# Altium PCB LPCB230R0.PcbDoc
Units mm, origin at the board's own origin, x right, y up, seen from the top; angles counter-clockwise.
Board outline 91 x 149 mm, 2 copper layers (Top Layer, Bottom Layer); 72 components, 55 nets, 301 pads, 119 vias.
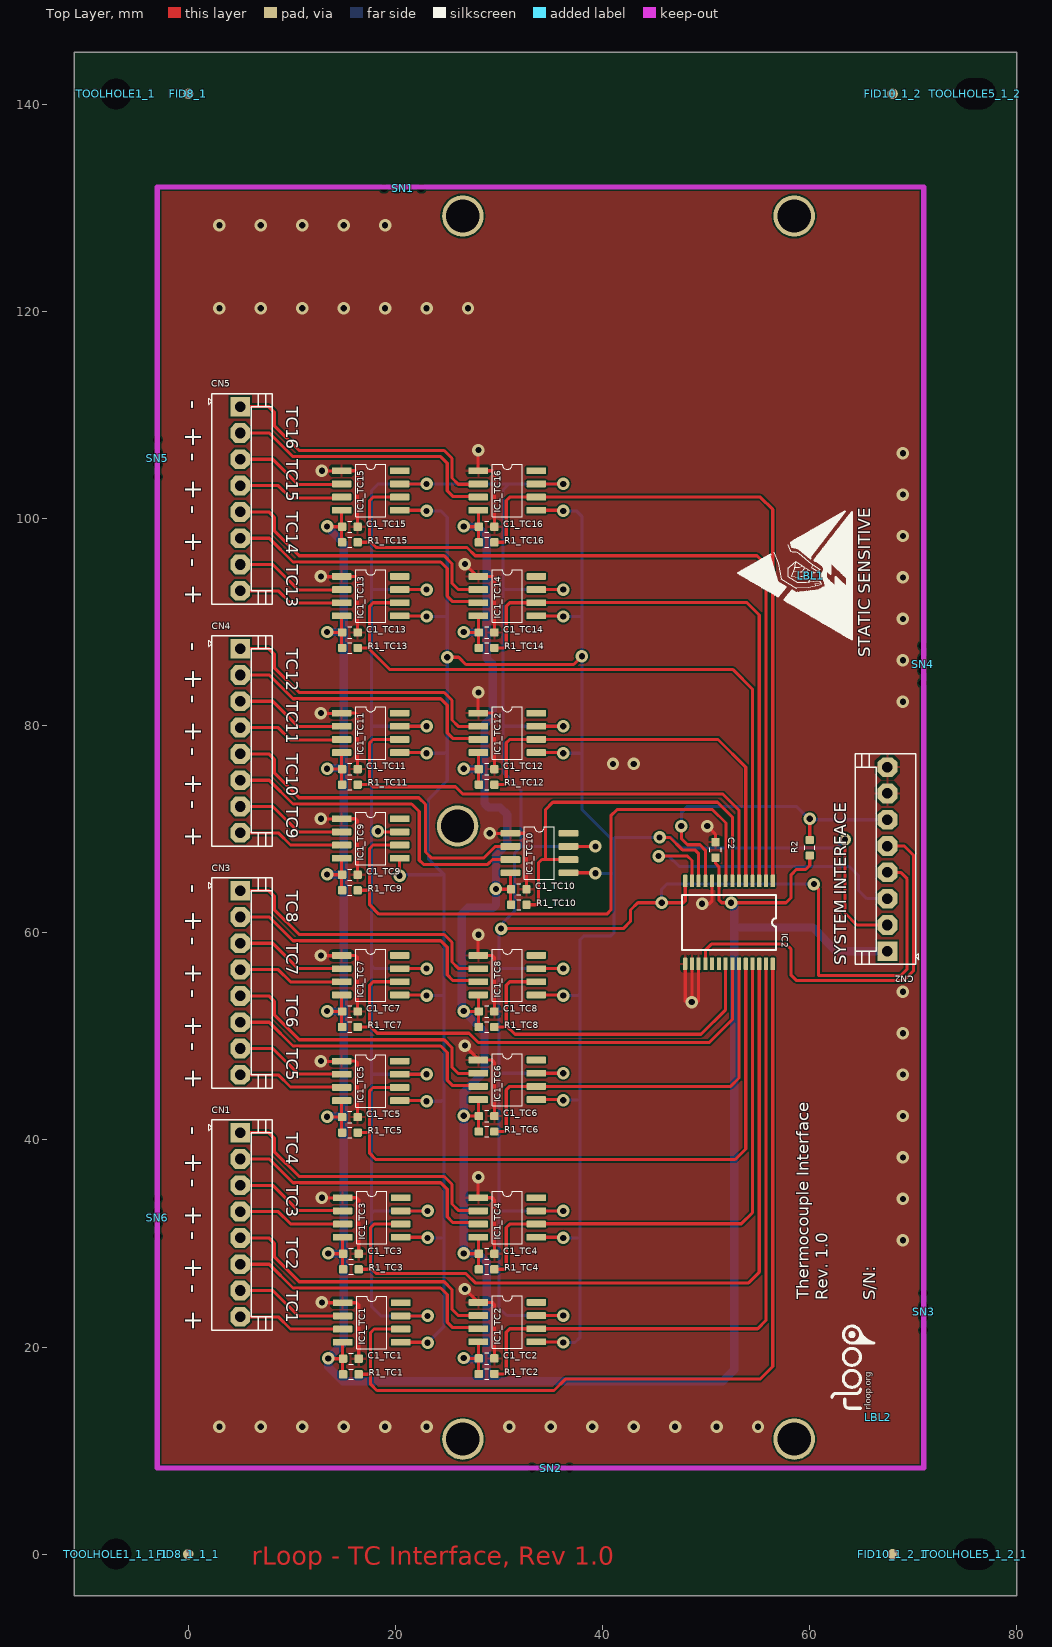
[diagram p0: Top Layer view]
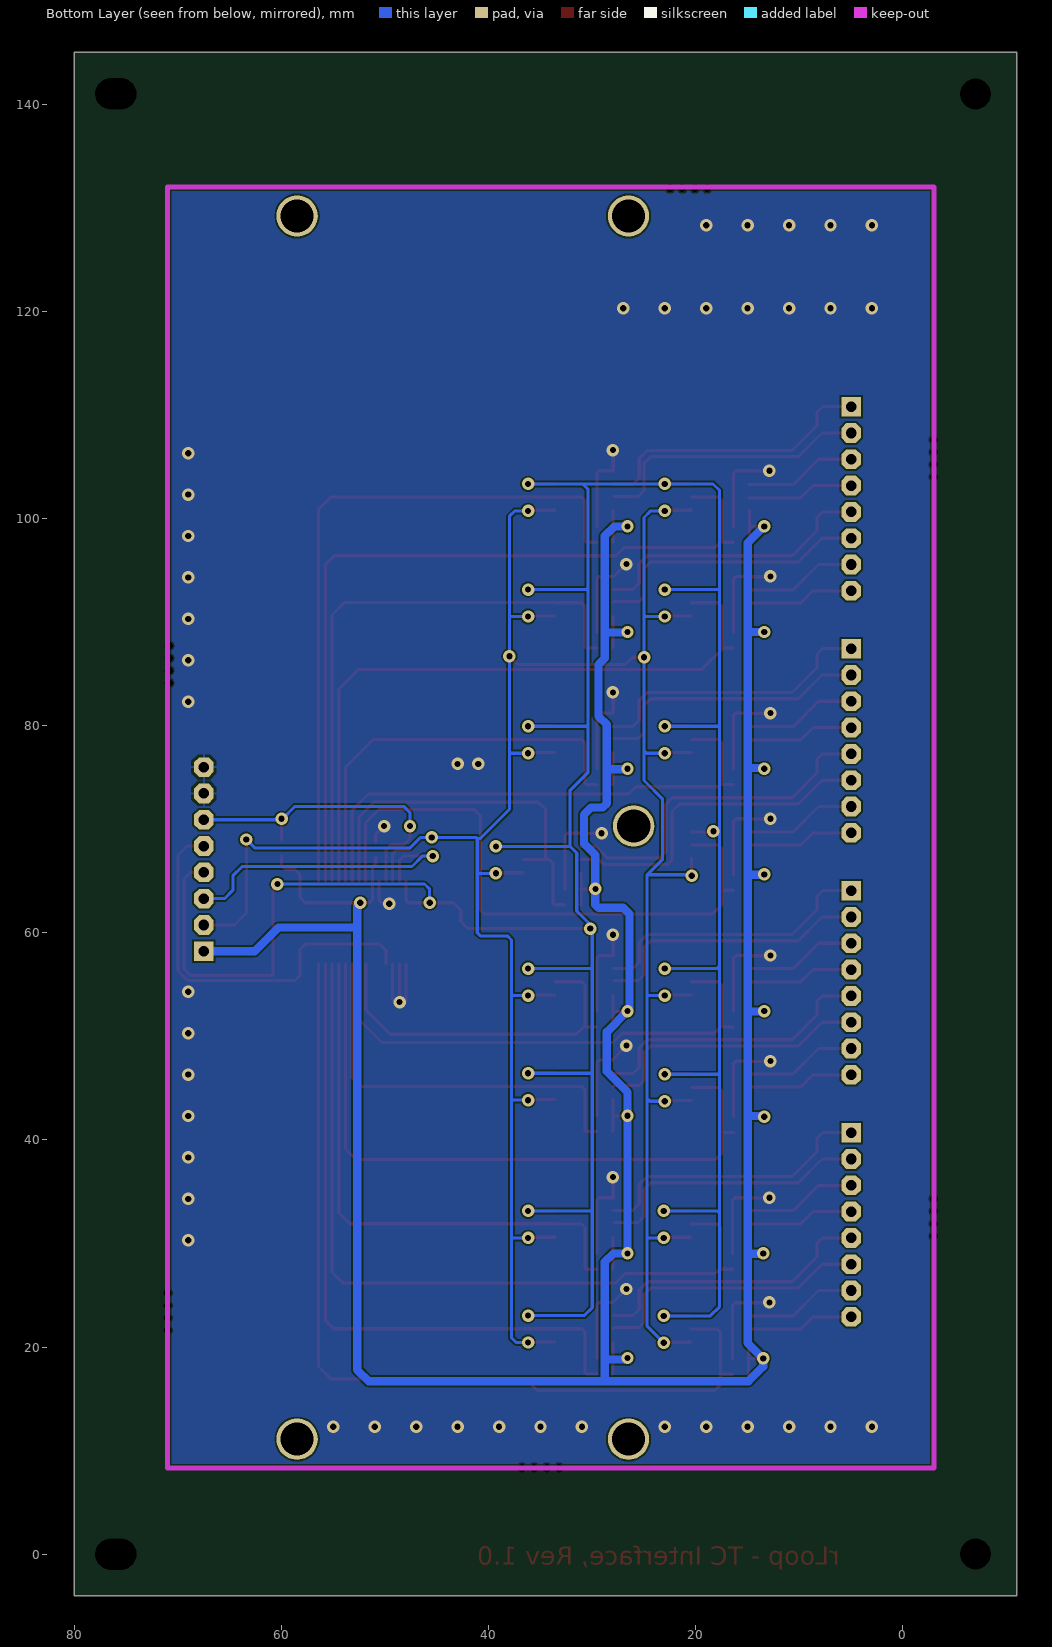
[diagram p1: Bottom Layer view, seen from below]

## Layer stack, top to bottom
Top Layer: signal copper 0.0356
Dielectric: core 0.32, FR-4, Dk 4.8
Bottom Layer: signal copper 0.0356

## Board outline
-11,-4 -11,145 80,145 80,-4

## Design rules (kind name [scope] priority, off if disabled: settings)
Clearance [All] p1: gap=0.16
HoleSize [All] p1: absolutevalues=TRUE maxlimit=4 minlimit=0.025 maxpercent=80.000 minpercent=20.000
MinimumSolderMaskSliver [All] p1 off: minsoldermaskwidth=0.1
PlaneClearance [All] p1: clearance=0.6
PlaneConnect [All] p1: planeconnectstyle=Direct reliefexpansion=0.508 reliefentries=4 reliefconductorwidth=0.254 reliefairgap=0.254
PolygonConnect [isVia] p1: connectstyle=Direct reliefconductorwidth=0.254 reliefentries=4 polygonreliefangle="90 Angle" airgapwidth=0.254
PolygonConnect PolygonConnect_1 [All] p2: connectstyle=Relief reliefconductorwidth=0.254 reliefentries=4 polygonreliefangle="90 Angle" airgapwidth=0.254
RoomDefinition "U_LPCB230 - TC INTERFACE" [InComponentClass('U_LPCB230 - TC INTERFACE')] p1: confinementstyle=ConfineIn formatcopy=TRUE lockcomponents=FALSE outline -79.611,-125.874 -28.811,-125.874 -28.811,-100.474 -79.611,-100.474
RoomDefinition TC16 [InComponentClass('TC16')] p2: confinementstyle=ConfineIn formatcopy=TRUE lockcomponents=FALSE outline 26.2,96.7 37.4,96.7 37.4,106.1 26.2,106.1
RoomDefinition TC15 [InComponentClass('TC15')] p3: confinementstyle=ConfineIn formatcopy=TRUE lockcomponents=FALSE outline 13,96.7 24.2,96.7 24.2,106.1 13,106.1
RoomDefinition TC14 [InComponentClass('TC14')] p4: confinementstyle=ConfineIn formatcopy=TRUE lockcomponents=FALSE outline 26.2,86.5 37.4,86.5 37.4,95.9 26.2,95.9
RoomDefinition TC13 [InComponentClass('TC13')] p5: confinementstyle=ConfineIn formatcopy=TRUE lockcomponents=FALSE outline 13,86.5 24.2,86.5 24.2,95.9 13,95.9
RoomDefinition TC10 [InComponentClass('TC10')] p6: confinementstyle=ConfineIn formatcopy=TRUE lockcomponents=FALSE outline 29.3,61.7 40.5,61.7 40.5,71.1 29.3,71.1
RoomDefinition TC8 [InComponentClass('TC8')] p7: confinementstyle=ConfineIn formatcopy=TRUE lockcomponents=FALSE outline 26.2,49.9 37.4,49.9 37.4,59.3 26.2,59.3
RoomDefinition TC7 [InComponentClass('TC7')] p8: confinementstyle=ConfineIn formatcopy=TRUE lockcomponents=FALSE outline 13,49.9 24.2,49.9 24.2,59.3 13,59.3
RoomDefinition TC6 [InComponentClass('TC6')] p9: confinementstyle=ConfineIn formatcopy=TRUE lockcomponents=FALSE outline 26.2,39.8 37.4,39.8 37.4,49.2 26.2,49.2
RoomDefinition TC5 [InComponentClass('TC5')] p10: confinementstyle=ConfineIn formatcopy=TRUE lockcomponents=FALSE outline 13,39.7 24.2,39.7 24.2,49.1 13,49.1
RoomDefinition TC4 [InComponentClass('TC4')] p11: confinementstyle=ConfineIn formatcopy=TRUE lockcomponents=FALSE outline 26.2,26.505 37.4,26.505 37.4,35.905 26.2,35.905
RoomDefinition TC3 [InComponentClass('TC3')] p12: confinementstyle=ConfineIn formatcopy=TRUE lockcomponents=FALSE outline 13.1,26.505 24.3,26.505 24.3,35.905 13.1,35.905
RoomDefinition TC2 [InComponentClass('TC2')] p13: confinementstyle=ConfineIn formatcopy=TRUE lockcomponents=FALSE outline 26.2,16.405 37.4,16.405 37.4,25.805 26.2,25.805
RoomDefinition TC1 [InComponentClass('TC1')] p14: confinementstyle=ConfineIn formatcopy=TRUE lockcomponents=FALSE outline 13.1,16.37 24.3,16.37 24.3,25.77 13.1,25.77
RoomDefinition "LPCB230 - OVERVIEW" [InComponentClass('LPCB230 - OVERVIEW')] p15: confinementstyle=ConfineIn formatcopy=TRUE lockcomponents=FALSE outline 129.189,-2.574 135.789,-2.574 135.789,20.725 129.189,20.725
RoomDefinition TC9 [InComponentClass('TC9')] p16: confinementstyle=ConfineIn formatcopy=TRUE lockcomponents=FALSE outline 13,63.1 24.2,63.1 24.2,72.5 13,72.5
RoomDefinition TC12 [InComponentClass('TC12')] p17: confinementstyle=ConfineIn formatcopy=TRUE lockcomponents=FALSE outline 26.2,73.3 37.4,73.3 37.4,82.7 26.2,82.7
RoomDefinition TC11 [InComponentClass('TC11')] p18: confinementstyle=ConfineIn formatcopy=TRUE lockcomponents=FALSE outline 13,73.3 24.2,73.3 24.2,82.7 13,82.7
RoutingVias [All] p1: holewidth=0.6 width=1.2 viastyle="Through Hole" minholewidth=0.6 minwidth=1.2 maxholewidth=1 maxwidth=3
SilkToSilkClearance [All] p1 off: silktosilkclearance=0.1
SilkToSolderMaskClearance [IsPad] p1 off: minsilkscreentomaskgap=0.1 clearancetoexposedcopper=TRUE
SolderMaskExpansion [All] p1: expansion=0.102
Width [All] p1: maxlimit=2 minlimit=0.254 preferedwidth=0.254
22 further rules are at their usual default settings.

## Classes and differential pairs
channel class "LPCB230 - TC CHANNEL": TC1 TC2 TC3 TC4 TC5 TC6 TC7 TC8 TC9 TC10 TC11 TC12 TC13 TC14 TC15 TC16
net class TC_POS[1..16]: TC_POS1 TC_POS2 TC_POS3 TC_POS4 TC_POS5 TC_POS6 TC_POS7 TC_POS8 TC_POS9 TC_POS10 TC_POS11 TC_POS12 TC_POS13 TC_POS14 TC_POS15 TC_POS16
net class TC_NEG[1..16]: TC_NEG1 TC_NEG2 TC_NEG3 TC_NEG4 TC_NEG5 TC_NEG6 TC_NEG7 TC_NEG8 TC_NEG9 TC_NEG10 TC_NEG11 TC_NEG12 TC_NEG13 TC_NEG14 TC_NEG15 TC_NEG16
net class TC_NCS[1..16]: TC_NCS1 TC_NCS2 TC_NCS3 TC_NCS4 TC_NCS5 TC_NCS6 TC_NCS7 TC_NCS8 TC_NCS9 TC_NCS10 TC_NCS11 TC_NCS12 TC_NCS13 TC_NCS14 TC_NCS15 TC_NCS16
component class "U_LPCB230 - TC INTERFACE": C2 IC2 R2
component class TC16: C1_TC16 IC1_TC16 R1_TC16
component class TC15: C1_TC15 IC1_TC15 R1_TC15
component class TC14: C1_TC14 IC1_TC14 R1_TC14
component class TC13: C1_TC13 IC1_TC13 R1_TC13
component class TC12: C1_TC12 IC1_TC12 R1_TC12
component class TC11: C1_TC11 IC1_TC11 R1_TC11
component class TC10: C1_TC10 IC1_TC10 R1_TC10
component class TC9: C1_TC9 IC1_TC9 R1_TC9
component class TC8: C1_TC8 IC1_TC8 R1_TC8
component class TC7: C1_TC7 IC1_TC7 R1_TC7
component class TC6: C1_TC6 IC1_TC6 R1_TC6
component class TC5: C1_TC5 IC1_TC5 R1_TC5
component class TC4: C1_TC4 IC1_TC4 R1_TC4
component class TC3: C1_TC3 IC1_TC3 R1_TC3
component class TC2: C1_TC2 IC1_TC2 R1_TC2
component class TC1: C1_TC1 IC1_TC1 R1_TC1
component class "LPCB230 - OVERVIEW": CN1 CN2 CN3 CN4 CN5 LBL1 LBL2 SN1 SN2 SN3 SN4 SN5 SN6 SN?

## Components (designator, comment, footprint, x,y, rotation, side; value= is the part's Value field where it differs from the comment)
C1_TC1 "100n / 50V / 10% / SMD 0603" LFP011__CC1608-0603-IPC7351_B 15.7,18.87 r0 top (schematic designator C1)
C1_TC2 "100n / 50V / 10% / SMD 0603" LFP011__CC1608-0603-IPC7351_B 28.8,18.905 r0 top (schematic designator C1)
C1_TC3 "100n / 50V / 10% / SMD 0603" LFP011__CC1608-0603-IPC7351_B 15.7,29.005 r0 top (schematic designator C1)
C1_TC4 "100n / 50V / 10% / SMD 0603" LFP011__CC1608-0603-IPC7351_B 28.8,29.005 r0 top (schematic designator C1)
C1_TC5 "100n / 50V / 10% / SMD 0603" LFP011__CC1608-0603-IPC7351_B 15.6,42.2 r0 top (schematic designator C1)
C1_TC6 "100n / 50V / 10% / SMD 0603" LFP011__CC1608-0603-IPC7351_B 28.8,42.3 r0 top (schematic designator C1)
C1_TC7 "100n / 50V / 10% / SMD 0603" LFP011__CC1608-0603-IPC7351_B 15.6,52.4 r0 top (schematic designator C1)
C1_TC8 "100n / 50V / 10% / SMD 0603" LFP011__CC1608-0603-IPC7351_B 28.8,52.4 r0 top (schematic designator C1)
C1_TC9 "100n / 50V / 10% / SMD 0603" LFP011__CC1608-0603-IPC7351_B 15.6,65.6 r0 top (schematic designator C1)
C1_TC10 "100n / 50V / 10% / SMD 0603" LFP011__CC1608-0603-IPC7351_B 31.9,64.2 r0 top (schematic designator C1)
C1_TC11 "100n / 50V / 10% / SMD 0603" LFP011__CC1608-0603-IPC7351_B 15.6,75.8 r0 top (schematic designator C1)
C1_TC12 "100n / 50V / 10% / SMD 0603" LFP011__CC1608-0603-IPC7351_B 28.8,75.8 r0 top (schematic designator C1)
C1_TC13 "100n / 50V / 10% / SMD 0603" LFP011__CC1608-0603-IPC7351_B 15.6,89 r0 top (schematic designator C1)
C1_TC14 "100n / 50V / 10% / SMD 0603" LFP011__CC1608-0603-IPC7351_B 28.8,89 r0 top (schematic designator C1)
C1_TC15 "100n / 50V / 10% / SMD 0603" LFP011__CC1608-0603-IPC7351_B 15.6,99.2 r0 top (schematic designator C1)
C1_TC16 "100n / 50V / 10% / SMD 0603" LFP011__CC1608-0603-IPC7351_B 28.8,99.2 r0 top (schematic designator C1)
C2 "100n / 50V / 10% / SMD 0603" LFP011__CC1608-0603-IPC7351_B 50.9,68 r90 top
CN1 "640456-8" 640456-8 5,31.805 r270 top locked
CN2 "640456-8" 640456-8 67.5,67.1 r90 top locked
CN3 "640456-8" 640456-8 5,55.171 r270 top locked
CN4 "640456-8" 640456-8 5,78.538 r270 top locked
CN5 "640456-8" 640456-8 5,101.905 r270 top locked
FID8_1 "FIDUCIAL" FIDTOP 0,141 r0 top
FID8_1_1_1 "FIDUCIAL" FIDTOP 0,0 r0 top
FID10_1_2 "FIDUCIAL" FIDTOP 68,141 r0 top
FID10_1_2_1 "FIDUCIAL" FIDTOP 68,0 r0 top
IC1_TC1 "MAX31855K" LFP017__SO-G8/Y1.9 17.7,22.37 r270 top (schematic designator IC1)
IC1_TC2 "MAX31855K" LFP017__SO-G8/Y1.9 30.8,22.405 r270 top (schematic designator IC1)
IC1_TC3 "MAX31855K" LFP017__SO-G8/Y1.9 17.7,32.505 r270 top (schematic designator IC1)
IC1_TC4 "MAX31855K" LFP017__SO-G8/Y1.9 30.8,32.505 r270 top (schematic designator IC1)
IC1_TC5 "MAX31855K" LFP017__SO-G8/Y1.9 17.6,45.7 r270 top (schematic designator IC1)
IC1_TC6 "MAX31855K" LFP017__SO-G8/Y1.9 30.8,45.8 r270 top (schematic designator IC1)
IC1_TC7 "MAX31855K" LFP017__SO-G8/Y1.9 17.6,55.9 r270 top (schematic designator IC1)
IC1_TC8 "MAX31855K" LFP017__SO-G8/Y1.9 30.8,55.9 r270 top (schematic designator IC1)
IC1_TC9 "MAX31855K" LFP017__SO-G8/Y1.9 17.6,69.1 r270 top (schematic designator IC1)
IC1_TC10 "MAX31855K" LFP017__SO-G8/Y1.9 33.9,67.7 r270 top (schematic designator IC1)
IC1_TC11 "MAX31855K" LFP017__SO-G8/Y1.9 17.6,79.3 r270 top (schematic designator IC1)
IC1_TC12 "MAX31855K" LFP017__SO-G8/Y1.9 30.8,79.3 r270 top (schematic designator IC1)
IC1_TC13 "MAX31855K" LFP017__SO-G8/Y1.9 17.6,92.5 r270 top (schematic designator IC1)
IC1_TC14 "MAX31855K" LFP017__SO-G8/Y1.9 30.8,92.5 r270 top (schematic designator IC1)
IC1_TC15 "MAX31855K" LFP017__SO-G8/Y1.9 17.6,102.7 r270 top (schematic designator IC1)
IC1_TC16 "MAX31855K" LFP017__SO-G8/Y1.9 30.8,102.7 r270 top (schematic designator IC1)
IC2 "MCP23S17-E/SS" LFP050__SSOP28 52.2,61 r180 top
LBL1 "STATIC LABEL" STATIC_LABEL 60.12,94.48 r90 top
LBL2 "RLOOP_LOGO" RLOOP_LOGO 66.6,13.2 r90 top
R1_TC1 "10K / 0.1W / 1% / SMD 0603" LFP020__CR1608-0603-IPC7351_B 15.7,17.37 r180 top (schematic designator R1)
R1_TC2 "10K / 0.1W / 1% / SMD 0603" LFP020__CR1608-0603-IPC7351_B 28.8,17.405 r180 top (schematic designator R1)
R1_TC3 "10K / 0.1W / 1% / SMD 0603" LFP020__CR1608-0603-IPC7351_B 15.7,27.505 r180 top (schematic designator R1)
R1_TC4 "10K / 0.1W / 1% / SMD 0603" LFP020__CR1608-0603-IPC7351_B 28.8,27.505 r180 top (schematic designator R1)
R1_TC5 "10K / 0.1W / 1% / SMD 0603" LFP020__CR1608-0603-IPC7351_B 15.6,40.7 r180 top (schematic designator R1)
R1_TC6 "10K / 0.1W / 1% / SMD 0603" LFP020__CR1608-0603-IPC7351_B 28.8,40.8 r180 top (schematic designator R1)
R1_TC7 "10K / 0.1W / 1% / SMD 0603" LFP020__CR1608-0603-IPC7351_B 15.6,50.9 r180 top (schematic designator R1)
R1_TC8 "10K / 0.1W / 1% / SMD 0603" LFP020__CR1608-0603-IPC7351_B 28.8,50.9 r180 top (schematic designator R1)
R1_TC9 "10K / 0.1W / 1% / SMD 0603" LFP020__CR1608-0603-IPC7351_B 15.6,64.1 r180 top (schematic designator R1)
R1_TC10 "10K / 0.1W / 1% / SMD 0603" LFP020__CR1608-0603-IPC7351_B 31.9,62.7 r180 top (schematic designator R1)
R1_TC11 "10K / 0.1W / 1% / SMD 0603" LFP020__CR1608-0603-IPC7351_B 15.6,74.3 r180 top (schematic designator R1)
R1_TC12 "10K / 0.1W / 1% / SMD 0603" LFP020__CR1608-0603-IPC7351_B 28.8,74.3 r180 top (schematic designator R1)
R1_TC13 "10K / 0.1W / 1% / SMD 0603" LFP020__CR1608-0603-IPC7351_B 15.6,87.5 r180 top (schematic designator R1)
R1_TC14 "10K / 0.1W / 1% / SMD 0603" LFP020__CR1608-0603-IPC7351_B 28.8,87.5 r180 top (schematic designator R1)
R1_TC15 "10K / 0.1W / 1% / SMD 0603" LFP020__CR1608-0603-IPC7351_B 15.6,97.7 r180 top (schematic designator R1)
R1_TC16 "10K / 0.1W / 1% / SMD 0603" LFP020__CR1608-0603-IPC7351_B 28.8,97.7 r180 top (schematic designator R1)
R2 "10K / 0.1W / 1% / SMD 0603" LFP020__CR1608-0603-IPC7351_B 60,68.2 r270 top
SN1 "PCB_SNAPOUT" SNAPOUT_NEW 22.5,131.9 r180 top
SN2 "PCB_SNAPOUT" SNAPOUT_NEW 36.8,8.305 r180 top
SN3 "PCB_SNAPOUT" SNAPOUT_NEW 71.012,21.607 r90 top
SN4 "PCB_SNAPOUT" SNAPOUT_NEW 70.9,84.105 r90 top
SN5 "PCB_SNAPOUT" SNAPOUT_NEW -3,104.005 r90 top
SN6 "PCB_SNAPOUT" SNAPOUT_NEW -3,30.705 r90 top
TOOLHOLE1_1 "Comment" TOOL-1#1 -7,141 r0 top
TOOLHOLE1_1_1_1 "Comment" TOOL-1#1 -7,0 r0 top
TOOLHOLE5_1_2 "Comment" TOOL-1#2 76,141 r0 top
TOOLHOLE5_1_2_1 "Comment" TOOL-1#2 76,0 r0 top

## Footprints (in the part's own frame and the unit in brackets; to place one, negate y for a bottom-side part, rotate by r counter-clockwise, add the part's x,y. Pads: shape width x height; smd on the part's side, far side on the other; paste and mask are expansions set on the pad)
640456-8 [mm] "Connector, Male Header, 8 Way"
  rect 1.905x1.905 hole 1.02: 1(-8.89,0)
  oct 1.905x1.905 hole 1.02: 2(-6.35,0) 3(-3.81,0) 4(-1.27,0) 5(1.27,0) 6(3.81,0) 7(6.35,0) 8(8.89,0)
  silkscreen extent -10.15,-3.04 10.17,3.1
FIDTOP [mil]
  round 40 smd mask+39.37: 1(0,0)
LFP011__CC1608-0603-IPC7351_B [mm]
  rrect25% 0.8x0.8 smd: 1(-0.75,0) 2(0.75,0)
  silkscreen extent -0.2,-0.55 0.2,0.55
LFP017__SO-G8/Y1.9 [mm]
  rrect25% 0.65x1.9 smd: 1(-1.905,-2.8) 2(-0.635,-2.8) 3(0.635,-2.8) 4(1.905,-2.8) 5(1.905,2.8) 6(0.635,2.8) 7(-0.635,2.8) 8(-1.905,2.8)
  silkscreen extent -2.52,-1.45 2.52,1.45
LFP020__CR1608-0603-IPC7351_B [mm]
  rrect25% 0.8x0.8 smd: 1(-0.75,0) 2(0.75,0)
  silkscreen extent -0.2,-0.5 0.2,0.5
LFP050__SSOP28 [mm]
  rrect25% 0.4x1.2 smd paste-0.05: 1(-4.225,-4) 2(-3.575,-4) 3(-2.925,-4) 4(-2.275,-4) 5(-1.625,-4) 6(-0.975,-4) 7(-0.325,-4) 8(0.325,-4) 9(0.975,-4) 10(1.625,-4) 11(2.275,-4) 12(2.925,-4) 13(3.575,-4) 14(4.225,-4) 15(4.225,4) 16(3.575,4) 17(2.925,4) 18(2.275,4) 19(1.625,4) 20(0.975,4) 21(0.325,4) 22(-0.325,4) 23(-0.975,4) 24(-1.625,4) 25(-2.275,4) 26(-2.925,4) 27(-3.575,4) 28(-4.225,4)
  silkscreen extent -4.55,-2.67 4.55,2.67
RLOOP_LOGO [mm]
  silkscreen extent 0.89,0.39 8.82,4.45
SNAPOUT_NEW [mm]
  round 0.4 hole 0.8 unplated: 0(0,0) 0(1.2,0) 0(2.4,0) 0(3.6,0)
STATIC_LABEL [mm]
  silkscreen extent -6.16,-3.95 6.18,7.02
TOOL-1#1 [mm]
  round 2.54 hole 3 unplated: TOOL(0,0)
TOOL-1#2 [mm]
  round 0.076 hole 3 slot 4 at 0 deg unplated: TOOL1(0,0)

## Part data
C1_TC1 C1_TC2 C1_TC3 C1_TC4 C1_TC5 C1_TC6 C1_TC7 C1_TC8 C1_TC9 C1_TC10 C1_TC11 C1_TC12 C1_TC13 C1_TC14 C1_TC15 C1_TC16 C2: "Capacitor, Ceramic Chip, 100nF (0.1uF), 50V, 5%, SMD 0603 [LCA016]"
CN1 CN2 CN3 CN4 CN5: "Connector, Male Header, 8 Way"
IC1_TC1 IC1_TC2 IC1_TC3 IC1_TC4 IC1_TC5 IC1_TC6 IC1_TC7 IC1_TC8 IC1_TC9 IC1_TC10 IC1_TC11 IC1_TC12 IC1_TC13 IC1_TC14 IC1_TC15 IC1_TC16: "IC, Thermocouple Interface, Type K, SMD SOIC-8 [LIC467]"
IC2: "IC, SPI IO Expander, 16bit, SMD SSOP28 [LIC289]"
R1_TC1 R1_TC2 R1_TC3 R1_TC4 R1_TC5 R1_TC6 R1_TC7 R1_TC8 R1_TC9 R1_TC10 R1_TC11 R1_TC12 R1_TC13 R1_TC14 R1_TC15 R1_TC16 R2: "Resistor, Ceramic Chip, 10K, 0.1W, 1%, SMD 0603 [LRE030]"

## Free pads (board coordinates)
  round 4 hole 3.2: B(26,70.305) B(26.5,11.105) B(26.5,129.205) B(58.5,11.105) B(58.5,129.205)

## Via types
v1: diameter 1.2, hole 0.6, Top Layer to Bottom Layer, 119 vias

## Nets (pads, with @x,y where several pads share a name; then routed paths per layer and width w, separated by ;. In a path a pad name is that pad's centre, name@x,y a point inside that pad or via, vN(x,y) a via of type N, cw(c..) or ccw(c..) an arc to the next point about the centre after c; other vN are vias at no path point)
D3V3: C1_TC1.1 C1_TC2.1 C1_TC3.1 C1_TC4.1 C1_TC5.1 C1_TC6.1 C1_TC7.1 C1_TC8.1 C1_TC9.1 C1_TC10.1 C1_TC11.1 C1_TC12.1 C1_TC13.1 C1_TC14.1 C1_TC15.1 C1_TC16.1 C2.1 CN2.1 IC1_TC1.4 IC1_TC2.4 IC1_TC3.4 IC1_TC4.4 IC1_TC5.4 IC1_TC6.4 IC1_TC7.4 IC1_TC8.4 IC1_TC9.4 IC1_TC10.4 IC1_TC11.4 IC1_TC12.4 IC1_TC13.4 IC1_TC14.4 IC1_TC15.4 IC1_TC16.4 IC2.9 R1_TC1.2 R1_TC2.2 R1_TC3.2 R1_TC4.2 R1_TC5.2 R1_TC6.2 R1_TC7.2 R1_TC8.2 R1_TC9.2 R1_TC10.2 R1_TC11.2 R1_TC12.2 R1_TC13.2 R1_TC14.2 R1_TC15.2 R1_TC16.2 R2.2 | length 382.9
  Top Layer w0.3: v1(13.4,42.235) 13.435,42.2 C1_TC5.1@14.8,42.2 ; v1(13.4,52.435) 13.435,52.4 C1_TC7.1@14.8,52.4 ; v1(13.4,65.635) 13.435,65.6 C1_TC9.1@14.8,65.6 ; v1(13.4,75.835) 13.435,75.8 C1_TC11.1@14.8,75.8 ; v1(13.4,89.035) 13.435,89 C1_TC13.1@14.8,89 ; v1(13.4,99.235) 13.435,99.2 C1_TC15.1@14.8,99.2 ; v1(13.5,18.905) 13.535,18.87 C1_TC1.1@14.9,18.87 ; v1(13.5,29.04) 13.535,29.005 C1_TC3.1@14.9,29.005 ; IC1_TC5.4 C1_TC5.1@14.8,42.2 ; IC1_TC7.4 C1_TC7.1@14.8,52.4 ; IC1_TC9.4 C1_TC9.1@14.8,65.6 ; IC1_TC11.4 C1_TC11.1@14.8,75.8 ; IC1_TC13.4 C1_TC13.1@14.8,89 ; IC1_TC15.4 C1_TC15.1@14.8,99.2 ; R1_TC5.2 14.8,40.75 C1_TC5.1@14.8,42.2 ; C1_TC5.1 C1_TC5.1@14.8,42.2 ; R1_TC7.2 14.8,50.95 C1_TC7.1@14.8,52.4 ; C1_TC7.1 C1_TC7.1@14.8,52.4 ; R1_TC9.2 14.8,64.15 C1_TC9.1@14.8,65.6 ; C1_TC9.1 C1_TC9.1@14.8,65.6 ; R1_TC11.2 14.8,74.35 C1_TC11.1@14.8,75.8 ; C1_TC11.1 C1_TC11.1@14.8,75.8 ; R1_TC13.2 14.8,87.55 C1_TC13.1@14.8,89 ; C1_TC13.1 C1_TC13.1@14.8,89 ; R1_TC15.2 14.8,97.75 C1_TC15.1@14.8,99.2 ; C1_TC15.1 C1_TC15.1@14.8,99.2 ; IC1_TC1.4 C1_TC1.1@14.9,18.87 ; IC1_TC3.4 C1_TC3.1@14.9,29.005 ; R1_TC1.2 14.9,17.42 C1_TC1.1@14.9,18.87 ; C1_TC1.1 C1_TC1.1@14.9,18.87 ; R1_TC3.2 14.9,27.555 C1_TC3.1@14.9,29.005 ; C1_TC3.1 C1_TC3.1@14.9,29.005 ; v1(26.6,18.94) 26.635,18.905 C1_TC2.1@28,18.905 ; v1(26.6,29.04) 26.635,29.005 C1_TC4.1@28,29.005 ; v1(26.6,42.335) 26.635,42.3 C1_TC6.1@28,42.3 ; v1(26.6,52.435) 26.635,52.4 C1_TC8.1@28,52.4 ; v1(26.6,75.835) 26.635,75.8 C1_TC12.1@28,75.8 ; v1(26.6,89.035) 26.635,89 C1_TC14.1@28,89 ; v1(26.6,99.235) 26.635,99.2 C1_TC16.1@28,99.2 ; IC1_TC2.4 C1_TC2.1@28,18.905 ; IC1_TC4.4 C1_TC4.1@28,29.005 ; IC1_TC6.4 C1_TC6.1@28,42.3 ; IC1_TC8.4 C1_TC8.1@28,52.4 ; IC1_TC12.4 C1_TC12.1@28,75.8 ; IC1_TC14.4 C1_TC14.1@28,89 ; IC1_TC16.4 C1_TC16.1@28,99.2 ; R1_TC2.2 28,17.455 C1_TC2.1@28,18.905 ; C1_TC2.1 C1_TC2.1@28,18.905 ; R1_TC4.2 28,27.555 C1_TC4.1@28,29.005 ; C1_TC4.1 C1_TC4.1@28,29.005 ; R1_TC6.2 28,40.85 C1_TC6.1@28,42.3 ; C1_TC6.1 C1_TC6.1@28,42.3 ; R1_TC8.2 28,50.95 C1_TC8.1@28,52.4 ; C1_TC8.1 C1_TC8.1@28,52.4 ; R1_TC12.2 28,74.35 C1_TC12.1@28,75.8 ; C1_TC12.1 C1_TC12.1@28,75.8 ; R1_TC14.2 28,87.55 C1_TC14.1@28,89 ; C1_TC14.1 C1_TC14.1@28,89 ; R1_TC16.2 28,97.75 C1_TC16.1@28,99.2 ; C1_TC16.1 C1_TC16.1@28,99.2 ; v1(29.7,64.235) 29.735,64.2 C1_TC10.1@31.1,64.2 ; IC1_TC10.4 C1_TC10.1@31.1,64.2 ; R1_TC10.2 31.1,62.75 C1_TC10.1@31.1,64.2 ; C1_TC10.1 C1_TC10.1@31.1,64.2 ; C2.1 50.9,66.7 51.225,66.375 IC2.9 51.225,63.175 51.5,62.9 v1(52.4,62.9) 57.7,62.9 58.2,63.4 58.2,65.6 58.7,66.1 59.6,66.1 60,66.5 R2.2
  Bottom Layer w0.3: 14.935,89.035 15,89.1
  Bottom Layer w0.8: v1(13.4,42.235) 13.465,42.3 15,42.3 ; v1(13.4,52.435) 13.435,52.4 15,52.4 ; v1(13.4,65.635) 13.435,65.6 15,65.6 ; v1(13.4,75.835) 13.465,75.9 15,75.9 ; v1(13.4,89.035) 14.935,89.035 ; v1(13.4,99.235) 15,97.635 15,89.1 15,75.9 ; v1(13.5,29.04) 13.54,29 15,29 ; v1(26.6,18.94) 26.74,18.8 28.8,18.8 ; v1(26.6,75.835) 26.635,75.8 28.6,75.8 ; v1(26.6,89.035) 26.635,89 28.8,89 ; v1(26.6,99.235) 27.865,99.235 28.8,98.3 28.8,89 ; v1(52.4,62.9) 52.7,62.6 52.7,60.5 ; CN2.1 62.59,58.21 60.3,60.5 52.7,60.5 ; 15,29 15,42.3 ; 15,29 15,20.405 v1(13.5,18.905) 13.5,18.1 14.9,16.7 28.8,16.7 ; 15,42.3 15,52.4 ; 15,52.4 15,65.6 ; 15,65.6 15,75.9 ; 28.6,75.8 28.6,80.1 29.4,80.9 29.4,85.9 28.8,86.5 28.8,89 ; 28.6,75.8 28.6,72.5 29,72.1 30.1,72.1 30.8,71.4 30.8,68.6 29.7,67.5 v1(29.7,64.235) 29.7,62.7 29.4,62.4 27,62.4 26.4,61.8 26.4,52.635 v1(26.6,52.435) 28.6,50.435 28.6,46.6 26.6,44.6 v1(26.6,42.335) v1(26.6,29.04) 27.96,29.04 28.8,28.2 28.8,18.8 ; 28.8,16.7 28.8,18.8 ; 28.8,16.7 51.6,16.7 52.7,17.8 52.7,60.5
DGND: C1_TC1.2 C1_TC2.2 C1_TC3.2 C1_TC4.2 C1_TC5.2 C1_TC6.2 C1_TC7.2 C1_TC8.2 C1_TC9.2 C1_TC10.2 C1_TC11.2 C1_TC12.2 C1_TC13.2 C1_TC14.2 C1_TC15.2 C1_TC16.2 C2.2 CN2.7 CN2.8 IC1_TC1.1 IC1_TC2.1 IC1_TC3.1 IC1_TC4.1 IC1_TC5.1 IC1_TC6.1 IC1_TC7.1 IC1_TC8.1 IC1_TC9.1 IC1_TC10.1 IC1_TC11.1 IC1_TC12.1 IC1_TC13.1 IC1_TC14.1 IC1_TC15.1 IC1_TC16.1 IC2.10 IC2.15 IC2.16 IC2.17 | length 157.6
  Top Layer w0.3: v1@12.83,47.575 IC1_TC5.1@14.8,47.575 ; v1@12.83,57.775 IC1_TC7.1@14.8,57.775 ; v1@12.83,70.975 IC1_TC9.1@14.8,70.975 ; v1@12.83,81.175 IC1_TC11.1@14.8,81.175 ; v1@12.83,94.375 IC1_TC13.1@14.8,94.375 ; v1(12.9,24.305) 12.93,24.275 IC1_TC1.1 16.23,24.275 16.45,24.055 C1_TC1.2 ; v1@12.93,34.375 IC1_TC3.1@14.9,34.375 ; v1@12.93,104.575 IC1_TC15.1@14.9,104.575 ; IC1_TC5.1 16.13,47.605 16.35,47.385 C1_TC5.2 ; IC1_TC7.1 16.13,57.805 16.35,57.585 C1_TC7.2 ; IC1_TC9.1 16.13,71.005 16.35,70.785 C1_TC9.2 ; IC1_TC11.1 16.13,81.205 16.35,80.985 C1_TC11.2 ; IC1_TC13.1 16.13,94.405 16.35,94.185 C1_TC13.2 ; IC1_TC15.1 16.13,104.605 16.35,104.385 C1_TC15.2 ; IC1_TC3.1 16.23,34.41 16.45,34.19 C1_TC3.2 ; v1(26.7,25.6) 27.99,24.31 IC1_TC2.1 29.33,24.31 29.55,24.09 C1_TC2.2 ; v1(26.7,49.1) 28,47.8 IC1_TC6.1 29.33,47.705 29.55,47.485 C1_TC6.2 ; v1(26.7,95.6) 27.895,94.405 IC1_TC14.1 29.33,94.405 29.55,94.185 C1_TC14.2 ; IC1_TC4.1@27.975,34.41 v1@27.975,36.38 ; IC1_TC8.1@27.975,57.805 v1@27.975,59.775 ; IC1_TC12.1@27.975,81.205 v1@27.975,83.175 ; IC1_TC16.1@27.975,104.6 v1@27.975,106.57 ; IC1_TC4.1 29.33,34.41 29.55,34.19 C1_TC4.2 ; IC1_TC8.1 29.33,57.805 29.55,57.585 C1_TC8.2 ; IC1_TC12.1 29.33,81.205 29.55,80.985 C1_TC12.2 ; IC1_TC16.1 29.33,104.605 29.55,104.385 C1_TC16.2 ; v1@29.13,69.58 IC1_TC10.1@31.1,69.58 ; IC1_TC10.1 32.43,69.605 32.65,69.385 C1_TC10.2 ; IC2.15 47.975,53.425 48.1,53.3 v1(48.6,53.3) ; IC2.16 48.625,53.325 v1(48.6,53.3) ; IC2.17 49.275,53.475 49.1,53.3 v1(48.6,53.3) ; v1(49.6,62.8) 50.3,62.8 50.575,63.075 IC2.10 ; v1(50.1,70.3) 50.9,69.5 C2.2
  other v1: 3,12.305 7,12.305 11,12.305 15,12.305 19,12.305 23,12.305 31,12.305 35,12.305 39,12.305 43,12.305 47,12.305 51,12.305 55,12.305 69,30.305 69,34.305 12.9,34.405 28.005,36.41 69,38.305 69,42.305 69,46.305 12.8,47.605 69,50.305 69,54.305 12.8,57.805 28.005,59.805 29.1,69.61 12.8,71.005 41,76.305 43,76.305 12.8,81.205 69,82.305 28.005,83.205 69,86.305 69,90.305 69,94.305 12.8,94.405 69,98.305 69,102.305 12.9,104.605 69,106.305 28.005,106.6 3,120.305 7,120.305 11,120.305 15,120.305 19,120.305 23,120.305 27,120.305 3,128.305 7,128.305 11,128.305 15,128.305 19,128.305
EXPAND_MOSI: CN2.3 IC2.13 | length 30
  Top Layer w0.3: v1(45.4,67.4) 48.2,67.4 48.625,66.975 IC2.13
  Bottom Layer w0.3: v1(45.4,67.4) 46.4,67.4 47.4,66.4 63.8,66.4 64.7,65.5 64.7,64.1 65.51,63.29 CN2.3
EXPAND_NCS: CN2.6 IC2.11 R2.1 | length 31
  Top Layer w0.3: v1(47.6,70.3) 47.6,69.1 48.2,68.5 49.4,68.5 49.925,67.975 IC2.11 ; R2.1 v1(60,71)
  Bottom Layer w0.3: v1(47.6,70.3) 47.6,71.6 48.2,72.2 58.7,72.2 59.99,70.91 CN2.6
EXPAND_NRESET: CN2.5 IC2.18 | length 39
  Top Layer w0.3: IC2.18 49.925,58.325 50.5,58.9 57.7,58.9 58.2,58.4 58.2,55.9 58.7,55.4 69.1,55.4 70,56.3 70,67.5 69.13,68.37 CN2.5
EXPAND_SCK: CN2.2 IC1_TC1.5 IC1_TC2.5 IC1_TC3.5 IC1_TC4.5 IC1_TC5.5 IC1_TC6.5 IC1_TC7.5 IC1_TC8.5 IC1_TC9.5 IC1_TC10.5 IC1_TC11.5 IC1_TC12.5 IC1_TC13.5 IC1_TC14.5 IC1_TC15.5 IC1_TC16.5 IC2.12 | length 292
  Top Layer w0.3: IC1_TC5.5 22.94,43.795 v1(23,43.735) ; IC1_TC7.5 22.94,53.995 v1(23,53.935) ; v1(20.4,65.5) IC1_TC9.5 ; IC1_TC11.5 22.94,77.395 v1(23,77.335) ; IC1_TC13.5 22.94,90.595 v1(23,90.535) ; IC1_TC15.5 22.94,100.795 v1(23,100.735) ; IC1_TC1.5 23.04,20.465 v1(23.1,20.405) ; IC1_TC3.5 23.04,30.6 v1(23.1,30.54) ; v1(25,86.6) 26.1,86.6 26.8,85.9 37.2,85.9 v1(38,86.7) ; IC1_TC2.5 36.14,20.5 v1(36.2,20.44) ; IC1_TC4.5 36.14,30.6 v1(36.2,30.54) ; IC1_TC6.5 36.14,43.895 v1(36.2,43.835) ; IC1_TC8.5 36.14,53.995 v1(36.2,53.935) ; IC1_TC12.5 36.14,77.395 v1(36.2,77.335) ; IC1_TC14.5 36.14,90.595 v1(36.2,90.535) ; IC1_TC16.5 36.14,100.795 v1(36.2,100.735) ; IC1_TC10.5 39.24,65.795 v1(39.3,65.735) ; v1(45.5,69.2) 46.5,69.2 47.7,68 48.9,68 49.275,67.625 IC2.12 ; v1(63.4,69) 63.4,61.9 64.55,60.75 CN2.2
  Bottom Layer w0.3: v1(20.4,65.5) 20.5,65.6 24.7,65.6 ; v1(23,43.735) 24.435,43.735 24.7,44 ; v1(23,53.935) 24.665,53.935 24.7,53.9 ; v1(23,77.335) 24.735,77.335 25,77.6 ; v1(23,90.535) 24.835,90.535 25,90.7 ; v1(23,100.735) 24.365,100.735 25,100.1 25,90.7 ; v1(23.1,20.405) 24.7,22.005 24.7,30.6 ; v1(23.1,30.54) 24.64,30.54 24.7,30.6 ; v1(36.2,20.44) 37.34,20.44 37.8,20.9 37.8,30.6 ; v1(36.2,30.54) 37.74,30.54 37.8,30.6 ; v1(36.2,43.835) 37.735,43.835 37.8,43.9 ; v1(36.2,53.935) 37.635,53.935 37.8,54.1 ; v1(36.2,77.335) 37.935,77.335 38,77.4 ; v1(36.2,90.535) 37.965,90.535 38,90.5 ; v1(36.2,100.735) 37.465,100.735 38,100.2 38,90.5 ; v1(39.3,65.735) 40.965,65.735 41.1,65.6 ; v1(63.4,69) 62.6,68.2 47.6,68.2 46.6,69.2 v1(45.5,69.2) 41.2,69.2 41.1,69.1 ; 24.7,30.6 24.7,44 ; 24.7,44 24.7,53.9 ; 24.7,53.9 24.7,65.6 ; 24.7,65.6 23.2,67.1 23.2,72.9 25,74.7 25,77.6 ; 25,77.6 v1(25,86.6) 25,90.7 ; 37.8,30.6 37.8,43.9 ; 37.8,43.9 37.8,54.1 ; 37.8,54.1 37.8,59.3 38.2,59.7 40.8,59.7 41.1,60 41.1,65.6 ; 38,77.4 v1(38,86.7) 38,90.5 ; 38,77.4 38,71.9 40.8,69.1 41.1,69.1 ; 41.1,65.6 41.1,69.1
EXPAND_SOMI: CN2.4 IC1_TC1.7 IC1_TC2.7 IC1_TC3.7 IC1_TC4.7 IC1_TC5.7 IC1_TC6.7 IC1_TC7.7 IC1_TC8.7 IC1_TC9.7 IC1_TC10.7 IC1_TC11.7 IC1_TC12.7 IC1_TC13.7 IC1_TC14.7 IC1_TC15.7 IC1_TC16.7 IC2.14 | length 364.9
  Top Layer w0.3: v1@18.3,69.735 IC1_TC9.7 ; IC1_TC5.7 v1(23,46.335) ; IC1_TC7.7 v1(23,56.535) ; IC1_TC11.7 v1(23,79.935) ; IC1_TC13.7 v1(23,93.135) ; IC1_TC15.7 v1(23,103.335) ; IC1_TC1.7 v1(23.1,23.005) ; IC1_TC3.7 v1(23.1,33.14) ; v1(30.2,60.4) 42,60.4 42.7,61.1 42.7,62.2 43.4,62.9 v1(45.7,62.9) 47.8,62.9 47.975,63.075 IC2.14 ; IC1_TC2.7 v1(36.2,23.04) ; IC1_TC4.7 v1(36.2,33.14) ; IC1_TC6.7 v1(36.2,46.435) ; IC1_TC8.7 v1(36.2,56.535) ; IC1_TC12.7 v1(36.2,79.935) ; IC1_TC14.7 v1(36.2,93.135) ; IC1_TC16.7 v1(36.2,103.335) ; IC1_TC10.7 v1(39.3,68.335) ; v1(60.4,64.7) 60.84,64.26 60.84,55.86 68.76,55.86 69.4,56.5 69.4,65.2 68.77,65.83 CN2.4
  Bottom Layer w0.3: v1(18.3,69.8) 17.8,69.8 17.7,69.9 ; v1(23,46.335) 17.735,46.335 17.7,46.3 ; v1(23,56.535) 17.965,56.535 17.7,56.8 ; v1(23,79.935) 17.735,79.935 17.7,79.9 ; v1(23,93.135) 17.765,93.135 17.7,93.2 ; v1(23.1,23.005) 18.595,23.005 17.7,23.9 17.7,32.9 ; v1(23.1,33.14) 17.94,33.14 17.7,32.9 ; 30.4,76.6 30.4,75.5 ; v1(36.2,23.04) 30.76,23.04 30,23.8 30,33.2 ; v1(36.2,33.14) 30.06,33.14 30,33.2 ; v1(36.2,46.435) 30.065,46.435 30,46.5 ; v1(36.2,56.535) 30.065,56.535 30,56.6 ; v1(36.2,79.935) 30.565,79.935 30.4,80.1 ; v1(36.2,93.135) 30.565,93.135 30.4,93.3 ; v1(36.2,103.335) 30.935,103.335 ; v1(39.3,68.335) 32.135,68.335 ; v1(45.7,62.9) 45.7,64.2 46.2,64.7 v1(60.4,64.7) ; 17.7,32.9 17.7,46.3 ; 17.7,46.3 17.7,56.8 ; 17.7,56.8 17.7,69.9 ; 17.7,69.9 17.7,79.9 ; 17.7,79.9 17.7,93.2 ; 17.7,93.2 17.7,102.7 18.335,103.335 v1(23,103.335) 30.935,103.335 ; 30,33.2 30,46.5 ; 30,46.5 30,56.6 ; 30,56.6 30,60.6 31.5,62.1 31.5,67.7 32.135,68.335 ; 30.4,75.5 30.4,80.1 ; 30.4,75.5 32.135,73.765 32.135,68.335 ; 30.4,80.1 30.4,93.3 ; 30.4,93.3 30.4,102.8 30.935,103.335
TC_NCS1: IC1_TC1.6 IC2.28 R1_TC1.1 | length 88.2
  Top Layer w0.3: R1_TC1.1 17.465,17.37 17.6,17.505 ; IC1_TC1.6 17.93,21.735 17.6,21.405 17.6,17.505 ; IC2.28 56.425,18.125 55.2,16.9 36.4,16.9 35.3,15.8 18.2,15.8 17.6,16.4 17.6,17.505
TC_NCS2: IC1_TC2.6 IC2.27 R1_TC2.1 | length 65.1
  Top Layer w0.3: R1_TC2.1 30.565,17.405 30.7,17.54 30.7,21.44 31.03,21.77 31.4,21.77 IC1_TC2.6 54.97,21.77 55.775,22.575 IC2.27
TC_NCS3: IC1_TC3.6 IC2.26 R1_TC3.1 | length 76.5
  Top Layer w0.3: R1_TC3.1 17.465,27.505 17.6,27.64 ; IC1_TC3.6 17.93,31.87 17.6,31.54 17.6,27.64 ; IC2.26 55.125,27.225 54.1,26.2 27.7,26.2 26.8,27.1 18.14,27.1 17.6,27.64
TC_NCS4: IC1_TC4.6 IC2.25 R1_TC4.1 | length 53.5
  Top Layer w0.3: R1_TC4.1 30.565,27.505 30.7,27.64 30.7,31.54 31.03,31.87 31.4,31.87 IC1_TC4.6 33.63,31.9 53.4,31.9 54.475,32.975 IC2.25
TC_NCS5: IC1_TC5.6 IC2.24 R1_TC5.1 | length 65.2
  Top Layer w0.3: R1_TC5.1 17.365,40.7 17.5,40.835 ; IC1_TC5.6 17.83,45.065 17.5,44.735 17.5,40.835 ; IC2.24 53.825,39.125 52.8,38.1 18.1,38.1 17.5,38.7 17.5,40.835
TC_NCS6: IC1_TC6.6 IC2.23 R1_TC6.1 | length 39.1
  Top Layer w0.3: R1_TC6.1 30.565,40.8 30.7,40.935 30.7,44.835 31.03,45.165 31.4,45.165 IC1_TC6.6 52.365,45.165 53.175,45.975 IC2.23
TC_NCS7: IC1_TC7.6 IC2.22 R1_TC7.1 | length 50.1
  Top Layer w0.3: R1_TC7.1 17.365,50.9 17.5,51.035 ; IC1_TC7.6 17.83,55.265 17.5,54.935 17.5,51.035 ; IC2.22 52.525,51.625 50.3,49.4 28,49.4 27.1,50.3 18.235,50.3 17.5,51.035
TC_NCS8: IC1_TC8.6 IC2.21 R1_TC8.1 | length 35.1
  Top Layer w0.3: R1_TC8.1 30.565,50.9 30.7,51.035 ; IC1_TC8.6 31.03,55.265 30.7,54.935 30.7,51.035 ; IC2.21 51.875,52.575 49.5,50.2 31.535,50.2 30.7,51.035
TC_NCS9: IC1_TC9.6 IC2.8 R1_TC9.1 | length 60.1
  Top Layer w0.3: R1_TC9.1 17.365,64.1 17.5,64.235 ; IC1_TC9.6 17.83,68.465 17.5,68.135 17.5,64.235 ; IC2.8 51.91,65.035 51.91,70.59 50.6,71.9 41.4,71.9 40.8,71.3 40.8,62.2 40.4,61.8 18.4,61.8 17.5,62.7 17.5,64.235
TC_NCS10: IC1_TC10.6 IC2.7 R1_TC10.1 | length 38.1
  Top Layer w0.3: R1_TC10.1 33.665,62.7 33.8,62.835 33.8,66.735 34.13,67.065 34.5,67.065 ; IC1_TC10.6 34.5,67.065 ; IC2.7 52.525,71.175 51.1,72.6 35.2,72.6 34.5,71.9 34.5,67.065
TC_NCS11: IC1_TC11.6 IC2.6 R1_TC11.1 | length 51.7
  Top Layer w0.3: R1_TC11.1 17.365,74.3 17.5,74.435 ; IC1_TC11.6 17.83,78.665 17.5,78.335 17.5,74.435 ; IC2.6 53.175,71.825 51.6,73.4 26.5,73.4 25.8,74.1 17.835,74.1 17.5,74.435
TC_NCS12: IC1_TC12.6 IC2.5 R1_TC12.1 | length 40.5
  Top Layer w0.3: R1_TC12.1 30.565,74.3 30.7,74.435 30.7,78.335 31.03,78.665 31.4,78.665 IC1_TC12.6 51.135,78.665 53.825,75.975 IC2.5
TC_NCS13: IC1_TC13.6 IC2.4 R1_TC13.1 | length 65.4
  Top Layer w0.3: R1_TC13.1 17.365,87.5 ; IC1_TC13.6 17.83,91.865 17.5,91.535 17.5,87.635 17.365,87.5 ; IC2.4 54.475,83.525 52.6,85.4 19.465,85.4 17.365,87.5
TC_NCS14: IC1_TC14.6 IC2.3 R1_TC14.1 | length 55.9
  Top Layer w0.3: R1_TC14.1 30.565,87.5 30.7,87.635 30.7,91.535 31.03,91.865 31.4,91.865 IC1_TC14.6 33.635,91.9 53.9,91.9 55.125,90.675 IC2.3
TC_NCS15: IC1_TC15.6 IC2.2 R1_TC15.1 | length 77.9
  Top Layer w0.3: R1_TC15.1 17.365,97.7 17.5,97.835 ; IC1_TC15.6 17.83,102.065 17.5,101.735 17.5,97.835 ; IC2.2 55.775,95.525 54.9,96.4 27.7,96.4 26.9,97.2 18.135,97.2 17.5,97.835
TC_NCS16: IC1_TC16.6 IC2.1 R1_TC16.1 | length 67.3
  Top Layer w0.3: R1_TC16.1 30.565,97.7 30.7,97.835 30.7,101.735 31.03,102.065 31.4,102.065 IC1_TC16.6 55.235,102.065 56.425,100.875 IC2.1
TC_NEG1: CN1.7 IC1_TC1.2 | length 10.9
  Top Layer w0.3: CN1.7 8.15,25.455 10.6,23.005 IC1_TC1.2
TC_NEG2: CN1.5 IC1_TC2.2 | length 28
  Top Layer w0.3: CN1.5 7.77,30.535 8.3,30.005 8.3,28.705 10.7,26.305 24.7,26.305 25.46,25.545 25.46,23.645 26.065,23.04 IC1_TC2.2
TC_NEG3: CN1.3 IC1_TC3.2 | length 10.9
  Top Layer w0.3: CN1.3 8.15,35.615 10.6,33.165 IC1_TC3.2@14.9,33.165
TC_NEG4: CN1.1 IC1_TC4.2 | length 28
  Top Layer w0.3: CN1.1 7.77,40.695 8.3,40.165 8.3,38.865 10.7,36.465 24.7,36.465 25.46,35.705 25.46,33.805 26.065,33.2 IC1_TC4.2@28,33.2
TC_NEG5: CN3.7 IC1_TC5.2 | length 10.9
  Top Layer w0.3: CN3.7 8.15,48.821 10.6,46.371 IC1_TC5.2@14.9,46.371
TC_NEG6: CN3.5 IC1_TC6.2 | length 28
  Top Layer w0.3: CN3.5 7.77,53.901 8.3,53.371 8.3,52.071 10.7,49.671 24.7,49.671 25.46,48.911 25.46,47.011 26.065,46.406 IC1_TC6.2@28,46.406
TC_NEG7: CN3.3 IC1_TC7.2 | length 10.9
  Top Layer w0.3: CN3.3 8.15,58.981 10.6,56.531 IC1_TC7.2@14.9,56.531
TC_NEG8: CN3.1 IC1_TC8.2 | length 28
  Top Layer w0.3: CN3.1 7.77,64.061 8.3,63.531 8.3,62.231 10.7,59.831 24.7,59.831 25.46,59.071 25.46,57.171 26.065,56.566 IC1_TC8.2@28,56.566
TC_NEG9: CN4.7 IC1_TC9.2 | length 10.9
  Top Layer w0.3: CN4.7 8.15,72.188 10.6,69.738 IC1_TC9.2@14.9,69.738
TC_NEG10: CN4.5 IC1_TC10.2 | length 34.2
  Top Layer w0.3: CN4.5 7.77,77.268 8.3,76.738 8.3,75.438 10.7,73.038 22.262,73.038 22.9,72.4 22.9,67.8 23.5,67.2 28.5,67.2 29.635,68.335 IC1_TC10.2
TC_NEG11: CN4.3 IC1_TC11.2 | length 10.9
  Top Layer w0.3: CN4.3 8.15,82.348 10.6,79.898 IC1_TC11.2@14.9,79.898
TC_NEG12: CN4.1 IC1_TC12.2 | length 28
  Top Layer w0.3: CN4.1 7.77,87.428 8.3,86.898 8.3,85.598 10.7,83.198 24.7,83.198 25.46,82.438 25.46,80.538 26.065,79.933 IC1_TC12.2@28,79.933
TC_NEG13: CN5.7 IC1_TC13.2 | length 10.9
  Top Layer w0.3: CN5.7 8.15,95.555 10.6,93.105 IC1_TC13.2@14.9,93.105
TC_NEG14: CN5.5 IC1_TC14.2 | length 28
  Top Layer w0.3: CN5.5 7.77,100.635 8.3,100.105 8.3,98.805 10.7,96.405 24.7,96.405 25.46,95.645 25.46,93.745 26.065,93.14 IC1_TC14.2@28,93.14
TC_NEG15: CN5.3 IC1_TC15.2 | length 10.9
  Top Layer w0.3: CN5.3 8.15,105.715 10.6,103.265 IC1_TC15.2@14.9,103.265
TC_NEG16: CN5.1 IC1_TC16.2 | length 28
  Top Layer w0.3: CN5.1 7.77,110.795 8.3,110.265 8.3,108.965 10.7,106.565 24.7,106.565 25.46,105.805 25.46,103.905 26.065,103.3 IC1_TC16.2@28,103.3
TC_POS1: CN1.8 IC1_TC1.3 | length 10.4
  Top Layer w0.3: CN1.8 8.69,22.915 9.87,21.735 IC1_TC1.3
TC_POS2: CN1.6 IC1_TC2.3 | length 27.1
  Top Layer w0.3: CN1.6 7.81,27.995 10.1,25.705 24.365,25.705 25,25.07 25,22.405 25.535,21.87 27.9,21.87 IC1_TC2.3
TC_POS3: CN1.4 IC1_TC3.3 | length 10.4
  Top Layer w0.3: CN1.4 8.69,33.075 9.87,31.895 IC1_TC3.3@14.9,31.895
TC_POS4: CN1.2 IC1_TC4.3 | length 27
  Top Layer w0.3: CN1.2 7.81,38.155 10.1,35.865 24.365,35.865 25,35.23 25,32.565 25.535,32.03 IC1_TC4.3@27.9,32.03
TC_POS5: CN3.8 IC1_TC5.3 | length 10.4
  Top Layer w0.3: CN3.8 8.69,46.281 9.87,45.101 IC1_TC5.3@14.9,45.101
TC_POS6: CN3.6 IC1_TC6.3 | length 27.1
  Top Layer w0.3: CN3.6 7.81,51.361 10.1,49.071 24.365,49.071 25,48.436 25,45.771 25.535,45.236 27.9,45.236 IC1_TC6.3@28,45.136
TC_POS7: CN3.4 IC1_TC7.3 | length 10.4
  Top Layer w0.3: CN3.4 8.69,56.441 9.87,55.261 IC1_TC7.3@14.9,55.261
TC_POS8: CN3.2 IC1_TC8.3 | length 27
  Top Layer w0.3: CN3.2 7.81,61.521 10.1,59.231 24.365,59.231 25,58.596 25,55.931 25.535,55.396 IC1_TC8.3@27.9,55.396
TC_POS9: CN4.8 IC1_TC9.3 | length 10.4
  Top Layer w0.3: CN4.8 8.69,69.648 9.87,68.468 IC1_TC9.3@14.9,68.468
TC_POS10: CN4.6 IC1_TC10.3 | length 32.4
  Top Layer w0.3: CN4.6 7.81,74.728 10.1,72.438 21.562,72.438 22.3,71.7 22.3,67 22.7,66.6 28.9,66.6 29.365,67.065 29.735,67.065 IC1_TC10.3
TC_POS11: CN4.4 IC1_TC11.3 | length 10.4
  Top Layer w0.3: CN4.4 8.69,79.808 9.87,78.628 IC1_TC11.3@14.9,78.628
TC_POS12: CN4.2 IC1_TC12.3 | length 27
  Top Layer w0.3: CN4.2 7.81,84.888 10.1,82.598 24.365,82.598 25,81.963 25,79.298 25.535,78.763 IC1_TC12.3@27.9,78.763
TC_POS13: CN5.8 IC1_TC13.3 | length 10.4
  Top Layer w0.3: CN5.8 8.69,93.015 9.87,91.835 IC1_TC13.3@14.9,91.835
TC_POS14: CN5.6 IC1_TC14.3 | length 27.1
  Top Layer w0.3: CN5.6 7.81,98.095 10.1,95.805 24.365,95.805 25,95.17 25,92.505 25.535,91.97 27.9,91.97 IC1_TC14.3@28,91.87
TC_POS15: CN5.4 IC1_TC15.3 | length 10.4
  Top Layer w0.3: CN5.4 8.69,103.175 9.87,101.995 IC1_TC15.3@14.9,101.995
TC_POS16: CN5.2 IC1_TC16.3 | length 27
  Top Layer w0.3: CN5.2 7.81,108.255 10.1,105.965 24.365,105.965 25,105.33 25,102.665 25.535,102.13 IC1_TC16.3@27.9,102.13
pads on no net: FID8_1.1 FID8_1_1_1.1 FID10_1_2.1 FID10_1_2_1.1 IC1_TC1.8 IC1_TC2.8 IC1_TC3.8 IC1_TC4.8 IC1_TC5.8 IC1_TC6.8 IC1_TC7.8 IC1_TC8.8 IC1_TC9.8 IC1_TC10.8 IC1_TC11.8 IC1_TC12.8 IC1_TC13.8 IC1_TC14.8 IC1_TC15.8 IC1_TC16.8 IC2.19 IC2.20 SN1.0 SN2.0 SN3.0 SN4.0 SN5.0 SN6.0 TOOLHOLE1_1.TOOL TOOLHOLE1_1_1_1.TOOL TOOLHOLE5_1_2.TOOL1 TOOLHOLE5_1_2_1.TOOL1

## Polygon pours and split planes (outlines as drawn)
DGND on Top Layer "Bottom Layer-No Net" (solid, remove dead copper, pour order 7): -3,131.905 70.905,131.905 71,132 71,8.305 -3,8.305
DGND on Bottom Layer "Bottom Layer-No Net" (solid, remove dead copper, pour order 5): -3,8.305 71,8.305 71,132 70.905,131.905 -3,131.905

## Keep-outs
Keep-Out Layer:
  lines w0.5: -3,8.305 -3,132 71,132 71,8.305 -3,8.305

## Other copper
Top Layer:
  text "rLoop - TC Interface, Rev 1.0" at 6.1,-1.6 h3

## Silkscreen, mask and mechanical layers (free items; w line width, h text height)
Top Overlay:
  text "-" at -0.88,111.415 h3 r270
  text "TC16" at 9.09,110.795 h2 r270
  text "+" at -0.88,108.875 h3 r270
  text "-" at -0.88,106.335 h3 r270
  text "TC15" at 9.09,105.715 h2 r270
  text "+" at -0.88,103.795 h3 r270
  text "-" at -0.88,101.255 h3 r270
  text "TC14" at 9.09,100.635 h2 r270
  text "+" at -0.88,98.715 h3 r270
  text "-" at -0.88,96.175 h3 r270
  text "TC13" at 9.09,95.555 h2 r270
  text "+" at -0.88,93.635 h3 r270
  text "-" at -0.88,88.048 h3 r270
  text "TC12" at 9.09,87.428 h2 r270
  text "+" at -0.88,85.508 h3 r270
  text "-" at -0.88,82.968 h3 r270
  text "TC11" at 9.09,82.348 h2 r270
  text "+" at -0.88,80.428 h3 r270
  text "-" at -0.88,77.888 h3 r270
  text "TC10" at 9.09,77.268 h2 r270
  text "+" at -0.88,75.348 h3 r270
  text "-" at -0.88,72.808 h3 r270
  text "TC9" at 9.09,72.188 h2 r270
  text "+" at -0.88,70.268 h3 r270
  text "-" at -0.88,64.681 h3 r270
  text "TC8" at 9.09,64.061 h2 r270
  text "+" at -0.88,62.141 h3 r270
  text "-" at -0.88,59.601 h3 r270
  text "TC7" at 9.09,58.981 h2 r270
  text "+" at -0.88,57.061 h3 r270
  text "SYSTEM INTERFACE" at 63.93,56.865 h2 r90
  text "-" at -0.88,54.521 h3 r270
  text "TC6" at 9.09,53.901 h2 r270
  text "+" at -0.88,51.981 h3 r270
  text "-" at -0.88,49.441 h3 r270
  text "TC5" at 9.09,48.821 h2 r270
  text "+" at -0.88,46.901 h3 r270
  text "-" at -0.88,41.315 h3 r270
  text "TC4" at 9.09,40.695 h2 r270
  text "+" at -0.88,38.775 h3 r270
  text "-" at -0.88,36.235 h3 r270
  text "TC3" at 9.09,35.615 h2 r270
  text "+" at -0.88,33.695 h3 r270
  text "-" at -0.88,31.155 h3 r270
  text "TC2" at 9.09,30.535 h2 r270
  text "+" at -0.88,28.615 h3 r270
  text "-" at -0.88,26.075 h3 r270
  text "TC1" at 9.09,25.455 h2 r270
  text "Thermocouple Interface" at 60.3,24.6 h2 r90
  text "Rev. 1.0" at 62.1,24.5 h2 r90
  text "S/N:" at 66.7,24.5 h2 r90
  text "+" at -0.88,23.535 h3 r270
Mechanical 1:
  lines w0.1: -11,-4 80,-4 80,145 -11,145 -11,-4
  lines w0.12: -3,132 71,132
  lines w0.127: -3,132 -3,8.305 71,8.305 71,132
Mechanical 3:
  lines w2.4: -4.2,7.105 31.8,7.105 ; -4.2,7.2 -4.2,28.8 ; -4.2,36 -4.2,102 ; -4.2,109.2 -4.2,133.2 17,133.2 ; 24.2,133.2 72.2,133.2 72.2,90 ; 39,7.2 72.2,7.2 72.2,20 ; 72.2,26.4 72.2,82.8

## Text inside footprints (layer, text, board x,y; h text height)
LBL1: Top Overlay "STATIC SENSITIVE" at 66.216,86.606 h2 r90
LBL2: Top Overlay "rloop.org" at 66.1,13.95 h1 r90